# Altium PCB PCB_AVlabs AV-GMK MK I_2_2024-01-18 (1).pcbdoc (part 2 of 5)
Units mil, origin at the board's own origin, x right, y up, seen from the top; angles counter-clockwise.
Board outline 17777.1 x 9140.8 mil, 2 copper layers (Top Layer, Bottom Layer); 156 components, 279 nets, 1257 pads, 596 vias.
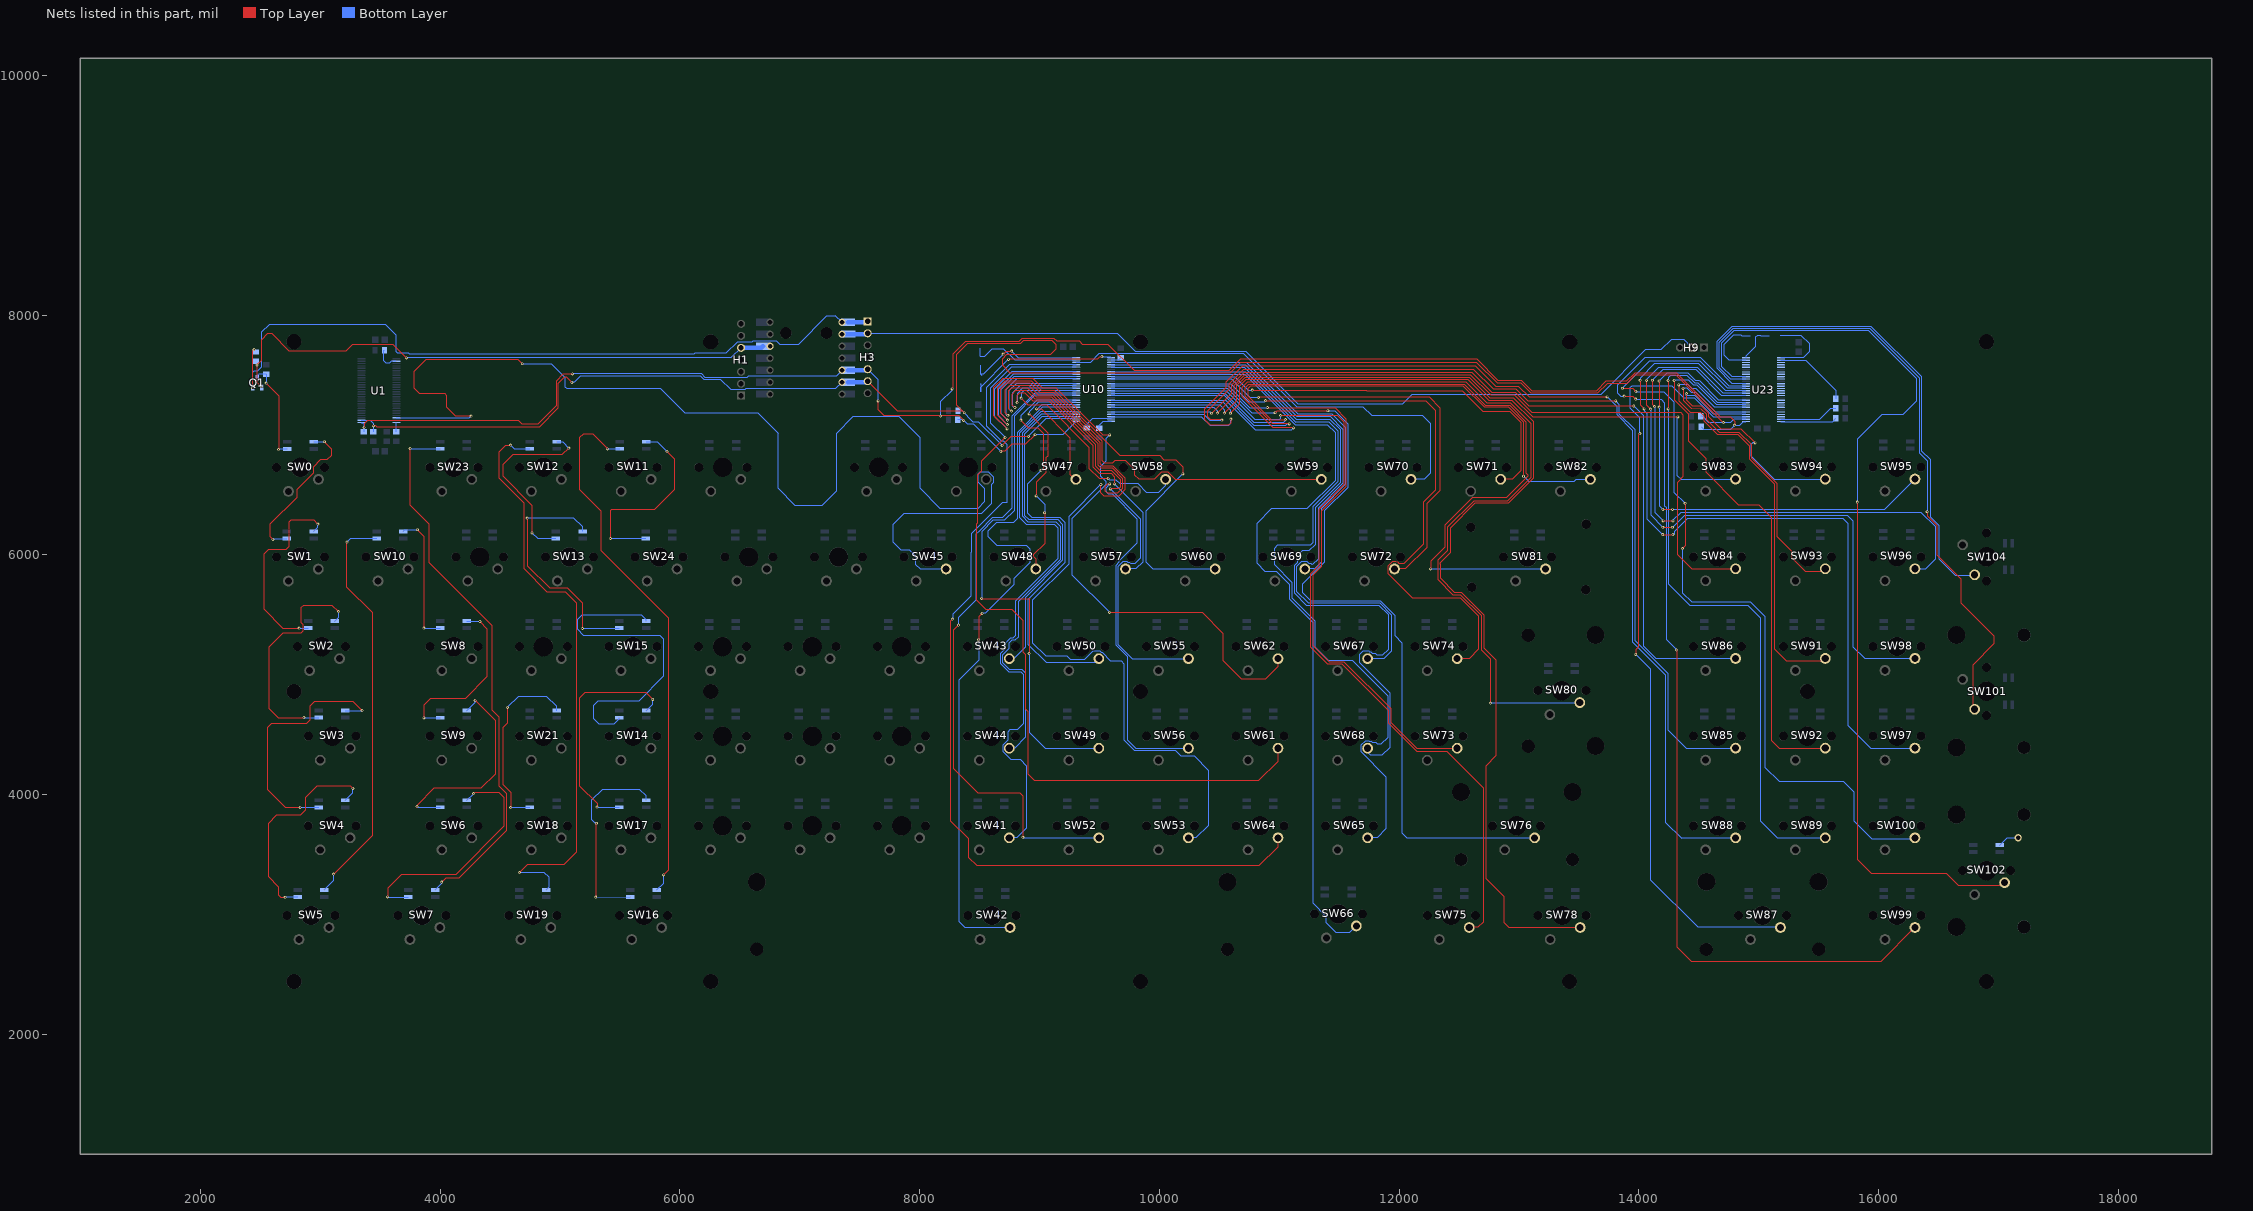
[diagram p2: the nets of this part, all layers, seen from the top]

## Via types
v1: diameter 24.41, hole 12.2, Top Layer to Bottom Layer, tented both sides, 596 vias

## Nets (pads, with @x,y where several pads share a name; then routed paths per layer and width w, separated by ;. In a path a pad name is that pad's centre, name@x,y a point inside that pad or via, vN(x,y) a via of type N, cw(c..) or ccw(c..) an arc to the next point about the centre after c; other vN are vias at no path point) (continued)
1_IO_4_7: SW45.SW1 U1.54 | length 10440.2
  Top Layer w10: v1(4258.8,7156.3) 4130.3,7156.3 4056.7,7229.9 4056.7,7327 4042.4,7341.3 3832.4,7341.3 3783.1,7390.6 3783.1,7529.9 3883.8,7630.6 4648.8,7630.6 v1(4685.9,7593.5)
  Bottom Layer w10: U1.54@3636.07,7142.32 4244.82,7142.32 v1(4258.8,7156.3) ; v1(4685.9,7593.5) 4928.9,7593.5 5041.2,7481.2 5041.2,7403.2 5055.2,7389.2 5837.2,7389.2 6042.2,7184.2 6649.2,7184.2 6819.2,7014.2 6816.2,7011.2 6816.2,6559.2 6960.2,6415.2 7186.2,6415.2 7307.2,6536.2 7307.2,7014.2 7447.2,7154.2 7826.2,7154.2 8000,6980.4 8000,6560.4 8170.2,6390.2 8489.2,6390.2 8545.2,6446.2 8545.2,6551.2 8491.2,6605.2 8491.2,6676.2 8506.2,6691.2 8574.2,6691.2 8616.2,6649.2 8616.2,6602.2 8597.2,6583.2 8597.2,6425.2 8515.2,6343.2 7869.2,6343.2 7777.2,6251.2 7777.2,6108.2 7844.2,6041.2 7915.2,6041.2 7964.2,5992.2 7964.2,5921.2 8003.6,5881.8 SW45.SW1@8221.19,5881.82
1_OE_PCA: R3.2 U1.30 | length 219.2
  Bottom Layer w10: R3.2@3536.57,7708.1 3529.8,7708.1 3529.8,7617.2 3549.4,7597.6 3576.1,7597.6 3593.3,7614.8 U1.30@3636.07,7614.76
1_RESET_PCA: R4.2 U1.56 | length 76.9
  Bottom Layer w10: R4.2@3634.7,7026.57 3636.07,7027.94 U1.56@3636.07,7102.95
2_A0: U10.27 | length 935.8
  Bottom Layer w10: 8505.12,7724.1 8505.52,7654.4 8543.3,7654.4 8606.9,7718 8698.6,7718 8791.74,7624.86 U10.27@9306.73,7624.86
2_A1: U10.28 | length 990.6
  Top Layer w10: v1(8696.2,7673.6) 8722,7699.4 v1(8768.6,7699.4)
  Bottom Layer w10: 8505.72,7581.3 8506.12,7511 ; 8519.52,7497.6 8506.12,7511 ; v1(8696.2,7673.6) 8533.6,7511 8506.12,7511 ; v1(8768.6,7699.4) 8823.45,7644.55 U10.28@9306.73,7644.55
2_A2: U10.29 | length 1307.1
  Top Layer w10: v1(8741.5,7630.1) 8745.5,7634.1 9484.6,7634.1 9503.6,7653.1 v1(9520.9,7653.1)
  Bottom Layer w10: 8507.92,7428.6 8508.92,7427.6 8508.92,7359 8508.92,7397.52 v1(8741.5,7630.1) ; v1(9520.9,7653.1) 9589.52,7653.1 U10.29@9598.07,7644.55
2_INT_PCA: R8.2 U10.55 | length 252.5
  Bottom Layer w10: R8.2@9396.2,7057.27 9396.2,7088.7 9441.4,7133.9 9596.9,7133.9 U10.55@9598.07,7132.74
2_IO_0_0: SW43.SW1 U10.3 | length 2842.9
  Bottom Layer w10: SW43.SW1@8748.09,5133.82 8785.2,5133.8 8879.4,5228 8879.4,5643.2 9191.6,5955.4 9191.6,6255.1 9151.6,6295.1 8910.8,6295.1 8875.1,6330.8 8875.1,7007.4 9020.1,7152.4 U10.3@9306.73,7152.42
2_IO_0_1: SW44.SW1 U10.4 | length 3848.2
  Bottom Layer w10: SW44.SW1@8748.09,4386.52 8791.7,4386.5 8881.3,4476.1 8881.3,5016.1 8853.3,5044.1 8747.3,5044.1 8688.3,5103.1 8688.3,5160.1 8744.3,5216.1 8744.3,5263.1 8767.3,5286.1 8794.3,5286.1 8822.3,5314.1 8822.3,5608.8 9173.3,5959.8 9173.3,6240 9136.5,6277.2 8904.3,6277.2 8857.2,6324.3 8857.2,7000.8 8857.5,7013.1 9015.7,7172.1 U10.4@9306.73,7172.11
2_IO_0_2: SW41.SW1 U10.5 | length 4878.9
  Bottom Layer w10: SW41.SW1@8747.99,3639.32 8810.4,3639.3 8891.1,3720 8891.1,4239.7 8838.1,4292.7 8761.1,4292.7 8691.8,4362 8691.8,4409.6 8734.1,4451.9 8734.1,4519.7 8754.1,4539.7 8814.1,4539.7 8863.1,4588.7 8863.1,4959.8 8864.4,4961.1 8864.4,5005.1 8845.7,5023.8 8741.7,5023.8 8671.3,5094.2 8671.3,5174 8712.8,5215.5 8712.8,5261.4 8754.3,5302.9 8779.1,5302.9 8799.1,5322.9 8799.1,5613.7 9150.9,5965.5 9150.9,6227.7 9124.6,6254 8889.5,6254 8830.2,6313.3 8830.2,7012.8 9009.2,7191.8 U10.5@9306.73,7191.79
2_IO_0_3: SW42.SW1 U10.7 | length 5836.9
  Top Layer w10: v1(8491.9,5291.7) 8491.9,5481.9 v1(8521.5,5511.5)
  Bottom Layer w10: v1(8491.9,5291.7) 8491.9,5119.2 8328.3,4955.6 8328.3,2941.6 8378.6,2891.3 SW42.SW1@8754.59,2891.32 ; v1(8521.5,5511.5) 8547.5,5511.5 8784.8,5748.8 8784.8,5801.7 8917.9,5934.8 8917.9,6052.2 8889.1,6081 8642.6,6081 8569.8,6153.8 8569.8,6196 8641.2,6267.4 8781.2,6267.4 8812.6,6298.8 8812.6,7018.6 9025.2,7231.2 U10.7@9306.73,7231.16
2_IO_0_4: SW47.SW1 U10.8 | length 1095.4
  Top Layer w10: v1(8976.4,7217.2) 9014.8,7217.2 9253.6,6978.4 9253.6,6974.3 9253.6,6670.6 9294.38,6629.82 SW47.SW1@9303.99,6629.82
  Bottom Layer w10: v1(8976.4,7217.2) 8983.7,7217.2 9017.3,7250.8 U10.8@9306.73,7250.85
2_IO_0_5: SW48.SW1 U10.9 | length 2335.4
  Top Layer w10: SW48.SW1@8969.39,5881.82 8969.38,5967.27 8948.8,5987.85 8948.8,5999.6 9042.1,6092.9 9042.1,6349.4 v1(9043.6,6350.9) ; v1(8972.2,6491.9) 8972.2,6603.3 9054.4,6685.5 9054.4,6807.6 9070.1,6823.3 ; 9070.1,6823.3 9070.1,7018.4 ; 9070.1,6823.3 9070.1,7018.4 ; 9070.1,7018.4 v1(8913.7,7174.8) 9070.1,7018.4
  Bottom Layer w10: v1(8913.7,7174.8) 8913.7,7193.3 8990.9,7270.5 U10.9@9306.73,7270.53 ; v1(8972.2,6491.9) 9043.6,6420.5 v1(9043.6,6350.9)
2_IO_0_6: SW50.SW1 U10.10 | length 3695.4
  Top Layer w10: v1(8845.2,7123) 8908.4,7059.8 8986.3,7059.8 9032.9,7013.2 9032.9,6705.1 v1(9013.9,6705.1)
  Bottom Layer w10: v1(8845.2,7123) 8845.2,7159.5 8975.9,7290.2 U10.10@9306.73,7290.22 ; v1(9013.9,6705.1) 8896.7,6587.9 8896.7,6351.7 8933.7,6314.7 9167.7,6314.7 9210.7,6271.7 9210.7,5935.7 8901.7,5626.7 8901.7,5254.7 9054.6,5101.8 9495.28,5101.8 SW50.SW1@9495.29,5133.82
2_IO_0_7: SW49.SW1 U10.12 | length 4433.5
  Top Layer w10: v1(8518.1,5636.8) 8519.5,5635.4 8919.4,5635.4 8914.1,5630.1 v1(8914.1,5175.4)
  Bottom Layer w10: v1(8518.1,5636.8) 8518.1,6194.1 8611.4,6287.4 8707.3,6287.4 8788.7,6368.8 8788.7,7155.72 8962.57,7329.59 U10.12@9306.73,7329.59 ; v1(8914.1,5175.4) 8914.1,4519.4 9046.98,4386.52 SW49.SW1@9495.29,4386.52
2_IO_1_0: SW52.SW1 U10.13 | length 5463.7
  Top Layer w10: v1(8324.5,5413.1) 8282.8,5371.4 8282.8,4217.8 8485.5,4015.1 8835.5,4015.1 8861.5,3989.1 v1(8861.5,3644.1)
  Bottom Layer w10: v1(8324.5,5413.1) 8324.5,5473.1 8470.5,5619.1 8470.5,6171.1 8496.5,6197.1 8606.5,6307.1 8608.5,6307.1 8689.5,6307.1 8769.5,6387.1 8769.5,7155.7 8767.5,7157.7 8959.07,7349.27 U10.13@9306.73,7349.27 ; v1(8861.5,3644.1) 8866.28,3639.32 SW52.SW1@9495.29,3639.32
2_IO_1_1: SW58.SW1 U10.14 | length 2217.1
  Top Layer w10: v1(8846.2,7306.8) 8900.8,7252.2 9059.5,7252.2 9412.9,6898.8 9412.9,6721.5 9496.9,6637.5 v1(9572.9,6637.5)
  Bottom Layer w10: v1(8846.2,7306.8) 8846.2,7345.5 8869.66,7368.96 U10.14@9306.73,7368.96 ; v1(9572.9,6637.5) 9583.2,6627.2 9637.5,6627.2 9669.5,6595.2 9820.2,6595.2 9892.2,6523.2 9996.2,6523.2 10051.98,6578.98 SW58.SW1@10051.99,6629.82
2_IO_1_2: SW57.SW1 U10.15 | length 2842.5
  Top Layer w10: v1(8814.2,7269.9) 8812.9,7271.2 8812.9,7329.9 8835.5,7352.5 8875.5,7352.5 8944.8,7283.2 9075.5,7283.2 9446.2,6912.5 9446.2,6732.5 9499.5,6679.2 9596.9,6679.2 9624.9,6651.2 v1(9624.9,6591.2)
  Bottom Layer w10: v1(8814.2,7269.9) 8814.2,7343.2 8812.9,7344.5 8857.04,7388.64 U10.15@9306.73,7388.64 ; v1(9624.9,6591.2) 9861.4,6354.7 9861.4,5939.7 9803.5,5881.8 SW57.SW1@9717.39,5881.82
2_IO_1_3: SW55.SW1 U10.16 | length 4481.8
  Top Layer w10: v1(8794.4,7228.7) 8773.8,7249.3 8773.8,7340.6 8804.2,7371 8889,7371 8958.8,7301.2 9086.6,7301.2 9465.1,6922.7 9465.1,6743.3 9502.9,6705.5 9598.3,6705.5 9672.3,6631.5 9672.3,6564.5 9658.3,6550.5 v1(9590.3,6550.5)
  Bottom Layer w10: v1(8794.4,7228.7) 8787.7,7228.7 8774.4,7242 8774.4,7346 8836.73,7408.33 U10.16@9306.73,7408.33 ; v1(9590.3,6550.5) 9838.8,6302 9838.8,5969.7 9793.5,5924.4 9764.1,5924.4 9754.8,5933.7 9738.8,5933.7 9730.8,5941.7 9694.8,5941.7 9654.8,5901.7 9654.8,5252.5 9773.5,5133.8 SW55.SW1@10242.59,5133.82
2_IO_1_4: SW56.SW1 U10.17 | length 5582
  Top Layer w10: v1(8766.1,7198.7) 8743.9,7220.2 8743.9,7368 8770.3,7394.4 8896.1,7394.4 8971.8,7318.7 9098.2,7318.7 9484.6,6932.3 9484.6,6752.2 9512.4,6724.4 9606.1,6724.4 9690.4,6640.1 9690.4,6552.2 9650.4,6512.2 9568.9,6512.2 9549.6,6531.5 9549.6,6570.1 9570.3,6590.8 v1(9586.1,6590.8)
  Bottom Layer w10: v1(8766.1,7198.7) 8745.4,7218.7 8745.4,7368 8805.4,7428 U10.17@9306.73,7428.01 ; v1(9586.1,6590.8) 9551.5,6556.2 9551.5,6531.6 9575,6508.1 9605.5,6508.1 9811,6302.6 9811,6097.1 9661,5947.1 9661,5936.6 9634.5,5910.1 9634.5,5249.1 9731,5152.6 9731,4457.9 9802.28,4386.62 SW56.SW1@10242.59,4386.62
2_IO_1_5: SW53.SW1 U10.19 | length 7477.7
  Top Layer w10: v1(8736.5,7163.7) 8715.5,7184.7 8715.5,7376.7 8753.5,7414.7 8910.5,7414.7 8989.5,7335.7 9104.5,7335.7 9502.5,6937.7 9502.5,6764.7 9522.5,6744.7 9612.5,6744.7 9712.5,6644.7 9712.5,6541.7 9660.3,6489.5 9539.5,6489.5 9512.5,6516.5 v1(9512.5,6586.5)
  Bottom Layer w10: v1(8736.5,7163.7) 8726.5,7163.7 8718.5,7171.7 8718.5,7376.7 8809.18,7467.38 U10.19@9306.73,7467.38 ; v1(9512.5,6586.5) 9242.6,6316.6 9242.6,5922.6 8939.9,5619.9 8939.9,5267.4 9050.4,5156.9 9226.6,5156.9 9255.6,5127.9 9377.6,5127.9 9449.6,5199.9 9502.6,5199.9 9516.6,5185.9 9522.6,5185.9 9591.6,5116.9 9681,5116.9 9704.7,5093.2 9704.7,4456.8 9791.6,4369.9 10130.6,4369.9 10178.6,4321.9 10289.6,4321.9 10406.6,4204.9 10406.6,3741.9 10304.02,3639.32 SW53.SW1@10242.59,3639.32
2_IO_1_6: SW59.SW1 U10.20 | length 4462
  Top Layer w10: v1(8733.6,7123.7) 8675.6,7181.7 8675.6,7384.2 8727.6,7436.2 8919.6,7436.2 9000.6,7355.2 9115.6,7355.2 9519.6,6951.2 9519.6,6790.2 9540.6,6769.2 9612.6,6769.2 9631.6,6788.2 9716.6,6788.2 9792.6,6712.2 9792.6,6669.2 9827.7,6634.1 9962.6,6634.1 10020.6,6692.1 10069.1,6692.1 10131.38,6629.82 SW59.SW1@11351.19,6629.82
  Bottom Layer w10: v1@8732.6,7113.2 8732.6,7122.7 v1(8733.6,7123.7) 8677.6,7179.7 8677.6,7375.2 8676.6,7376.2 8787.47,7487.07 U10.20@9306.73,7487.07
2_IO_1_7: SW60.SW1 U10.21 | length 4765.8
  Top Layer w10: v1(8732.2,7085.3) 8652.2,7165.3 8652.2,7392.3 8713.7,7453.8 8933.2,7453.8 9014.2,7372.8 9125.2,7372.8 9668.9,6829.1 10002,6829.1 10036.7,6794.4 10136.7,6794.4 10196.5,6734.6 v1(10196.5,6675.3)
  Bottom Layer w10: v1(8732.2,7085.3) 8655.2,7162.3 8655.2,7378.8 8783.15,7506.75 U10.21@9306.73,7506.75 ; v1(10196.5,6675.3) 9884.5,6363.3 9884.5,5941.3 9944,5881.8 SW60.SW1@10465.39,5881.82
2_IO_2_0: SW62.SW1 U10.22 | length 6358.7
  Top Layer w10: v1(8730.7,7049.5) 8620.7,7159.5 8620.7,7395.9 8697.2,7472.4 8944.3,7472.4 9024.3,7392.4 9137.1,7392.4 9528.6,7000.9 v1(9586.4,7000.9) ; v1(9584.3,5520.2) 10357.7,5520.2 10530.8,5347.1 10530.8,5120.5 10684.2,4967.1 10888.1,4967.1 10989.78,5068.78 SW62.SW1@10989.79,5133.82
  Bottom Layer w10: v1(8730.7,7049.5) 8623.6,7156.6 8623.6,7382.2 8767.84,7526.44 U10.22@9306.73,7526.44 ; v1(9584.3,5520.2) 9269.5,5835 9269.5,6302 9552.4,6584.9 9552.4,6613.9 9507.4,6658.9 9507.4,6734.9 9553.4,6780.9 9553.4,6967.9 v1(9586.4,7000.9)
2_IO_2_1: SW61.SW1 U10.24 | length 6747.3
  Top Layer w10: v1(8712.8,6978.7) 8514.8,6780.7 8514.8,6696.8 8479.6,6661.6 8479.6,6261.6 8472.2,6254.2 8472.2,5624.6 8550,5546.8 8768.5,5546.8 8859.2,5456.1 8859.2,5193.1 8882.6,5169.7 8882.6,4716.6 8903,4696.2 8903,4172.1 8956.7,4118.4 10828.9,4118.4 10989.78,4279.28 SW61.SW1@10989.79,4386.62
  Bottom Layer w10: v1(8712.8,6978.7) 8590.5,7101 8590.5,7391 8765.31,7565.81 U10.24@9306.73,7565.81
2_IO_2_2: SW64.SW1 U10.25 | length 7853.6
  Top Layer w10: v1(8275.2,5463.6) 8257.8,5446.2 8257.8,3783.6 8405.8,3635.6 8405.8,3478.3 8475.1,3409 10835.2,3409 10989.78,3563.58 SW64.SW1@10989.79,3639.32
  Bottom Layer w10: v1(8275.2,5463.6) 8275.2,5503.6 8427.2,5655.6 8427.2,6018.4 8429.8,6021 8429.8,6175.6 8688.5,6434.3 8725.8,6434.3 8725.8,6923.7 8696.5,6953 8681.8,6953 8556.5,7078.3 8556.5,7394.3 8747.7,7585.5 U10.25@9306.73,7585.49
2_IO_2_3: SW70.SW1 U10.26 | length 3825.3
  Bottom Layer w10: U10.26@9306.73,7605.18 9425.9,7605.2 9499.9,7679.2 10700.9,7679.2 11144.9,7235.2 11697.9,7235.2 11770.1,7163 12194.2,7163 12260.9,7096.3 12260.9,6679.7 12211,6629.8 SW70.SW1@12099.19,6629.82
2_IO_2_4: SW69.SW1 U10.31 | length 3551.5
  Bottom Layer w10: U10.31@9598.07,7605.18 10726.4,7605.2 11153.9,7177.7 11439.1,7177.7 11551.2,7065.6 11551.2,6586.7 11350.2,6385.7 11350.2,5937 11290.9,5877.7 11286.8,5881.8 SW69.SW1@11213.39,5881.82
2_IO_2_5: SW67.SW1 U10.32 | length 5163.9
  Bottom Layer w10: U10.32@9597.4,7585.3 10716.9,7585.3 11147.6,7154.5 11424.6,7154.5 11530.6,7048.6 11530.6,6594.8 11323.6,6387.8 11323.6,5963.6 11276.6,5916.6 11266.6,5926.6 11249.1,5926.6 11232.1,5943.6 11184.6,5943.6 11142.6,5901.6 11142.6,5695.5 11240.1,5598 11836.4,5598 11935.4,5499.1 11935.4,5195.3 11873.7,5133.7 SW67.SW1@11736.3,5133.7
2_IO_2_6: SW68.SW1 U10.33 | length 6250.6
  Bottom Layer w10: U10.33@9597.4,7565.7 10709.9,7565.7 11143.2,7132.4 11421.5,7132.4 11508.2,7045.8 11508.2,6603 11298.9,6393.8 11298.9,6085.8 11245.6,6032.4 11192.2,6032.4 11167.9,6008.2 11167.9,5963.3 11150.9,5946.3 11150.9,5934.6 11126.1,5909.8 11126.1,5882 11123.7,5879.6 11123.7,5681.8 11224.2,5581.2 11830.4,5581.2 11907.1,5504.5 11907.1,5210 11861.1,5164.1 11816.1,5164.1 11803.6,5176.6 11778.1,5176.6 11767.4,5187.2 11755.7,5187.2 11748.9,5194.1 11695.6,5194.1 11666.6,5165 11666.6,5103 11921.9,4847.7 11921.9,4392.4 11856.2,4326.8 11764,4326.8 11736.3,4354.4 SW68.SW1@11736.3,4386.4
2_IO_2_7: SW65.SW1 U10.35 | length 6785.8
  Bottom Layer w10: U10.35@9598.07,7526.44 10717.6,7526.4 11137.9,7106.1 11139.9,7108.1 11413.9,7108.1 11488.9,7033.1 11488.9,6611.1 11285.9,6408.1 11280.9,6402.4 11280.9,6102.1 11256.9,6078.1 10983.9,6078.1 10956.9,6051.1 10956.9,5919.1 11105.3,5770.7 11105.3,5643.2 11296.6,5451.9 11296.6,5231.7 11407.1,5121.2 11607.5,5121.2 11903.8,4824.9 11903.8,4475.9 11845.7,4417.7 11823.6,4417.7 11809.6,4431.7 11778.6,4431.7 11769.6,4440.7 11755.6,4440.7 11750.6,4445.7 11715.7,4445.7 11679.5,4409.5 11679.5,4359.8 11890.1,4149.2 11890.1,3713.3 11815.9,3639.3 SW65.SW1@11736.99,3639.32
2_IO_3_0: SW66.SW1 U10.36 | length 7202.3
  Bottom Layer w10: U10.36@9598.1,7506.7 10712.4,7506.7 11134.7,7084.4 11401.4,7084.4 11465.4,7020.4 11465.4,6617.7 11230.7,6383 10933.4,6383 10811.4,6261 10811.4,5933.1 10880.1,5864.4 10973.4,5864.4 11085.4,5752.4 11085.4,5631.4 11278.8,5438 11278.8,3096.4 11388.1,2987.1 11388.1,2936.4 11472.1,2852.4 11588.1,2852.4 11639.9,2904.2 SW66.SW1@11642.79,2904.22
2_IO_3_1: SW71.SW1 U10.37 | length 4176
  Top Layer w10: v1(10774.9,7373) 11726.9,7372.8 11729.5,7370.2 12526.9,7370.2 12698,7199.1 12921.6,7199.1 13013.7,7107 13013.7,6699.1 12944.5,6629.9 SW71.SW1@12847.19,6629.92
  Bottom Layer w10: U10.37@9598.07,7487.07 10628.83,7487.07 10742.9,7373 v1(10774.9,7373)
2_IO_3_2: SW72.SW1 U10.38 | length 4398.7
  Top Layer w10: v1(10826.1,7313.4) 10829.1,7316.4 12249.9,7316.4 12338.8,7227.5 12338.8,6534.9 12231.4,6427.5 12231.4,6060.8 12052.42,5881.82 SW72.SW1@11961.39,5881.82
  Bottom Layer w10: U10.38@9598.07,7467.38 10599.12,7467.38 10754.1,7312.4 10755.1,7313.4 v1(10826.1,7313.4)
2_IO_3_3: SW74.SW1 U10.40 | length 5799.1
  Top Layer w10: v1(10886,7285.3) 10887.3,7286.6 12220.7,7286.6 12302.2,7205.1 12302.2,6540.3 12200.4,6438.5 12200.4,6088.4 12038.6,5926.6 12000.4,5926.6 11990.8,5936.2 11978.5,5936.2 11972.2,5942.5 11941.9,5942.5 11905.3,5905.9 11905.3,5845 12109,5641.3 12511.6,5641.3 12660.9,5492 12660.9,5210.6 12584.1,5133.8 SW74.SW1@12484.19,5133.82
  Bottom Layer w10: U10.40@9598.07,7428.01 10593.49,7428.01 10743.7,7277.8 10878.5,7277.8 v1(10886,7285.3)
2_IO_3_4: SW73.SW1 U10.41 | length 5704.4
  Top Layer w10: v1(10900.3,7228.6) 10902.5,7226.4 11465.1,7226.4 11555.8,7135.7 11555.8,6569 11352.1,6365.3 11352.1,5900.5 11279.9,5828.3 11279.9,5244.9 11415.1,5109.7 11538.4,5109.7 11929.9,4718.2 11929.9,4602.3 12145.7,4386.5 SW73.SW1@12484.29,4386.52
  Bottom Layer w10: U10.41@9598.07,7408.33 10574.57,7408.33 10755.3,7227.6 10756.3,7228.6 v1(10900.3,7228.6)
2_IO_3_5: SW76.SW1 U10.42 | length 7488.3
  Top Layer w10: v1(10966.2,7184.6) 10983,7201.4 v1(11406.2,7201.4)
  Bottom Layer w10: U10.42@9598.07,7388.64 10564.86,7388.64 10770.2,7183.3 10771.5,7184.6 v1(10966.2,7184.6) ; v1(11406.2,7201.4) 11461.2,7201.4 11570,7092.6 11570,6561.2 11375,6366.2 11375,5938.4 11191.4,5754.8 11191.4,5689 11263.5,5616.9 11842.8,5616.9 11962.1,5497.6 11962.1,5327.6 12021.4,5268.3 12021.4,3679.9 12062,3639.3 SW76.SW1@13130.69,3639.32
2_IO_3_6: SW75.SW1 U10.43 | length 7330.5
  Top Layer w10: v1(11012.2,7161.2) 11015.2,7164.2 11485.2,7164.2 11538.2,7111.2 11538.2,6585.2 11328.2,6375.2 11328.2,5908.2 11258.2,5838.2 11258.2,5232.2 11400.2,5090.2 11522.5,5090.2 11911.2,4701.5 11911.2,4597.2 12147.2,4361.2 12396.2,4361.2 12701.2,4056.2 12701.2,2935.5 12657,2891.3 SW75.SW1@12584.99,2891.32
  Bottom Layer w10: U10.43@9598.07,7368.96 10557.44,7368.96 10796.2,7130.2 11005.2,7130.2 11012.2,7137.2 v1(11012.2,7161.2)
2_IO_3_7: SW82.SW1 U10.44 | length 5490.9
  Top Layer w10: v1(11051.3,7128) 10934.2,7128 10737.4,7324.8 10737.4,7385.4 10758.1,7406.1 12534.8,7406.1 12712.1,7228.8 12916.1,7228.8 13037.4,7107.5 v1(13037.4,6655.4)
  Bottom Layer w10: U10.44@9598.07,7349.27 10545.7,7349.3 10788.3,7106.7 11039.1,7106.7 11051.3,7118.9 v1(11051.3,7128) ; v1(13037.4,6655.4) 13080,6612.8 13461.4,6612.8 13478.42,6629.82 SW82.SW1@13595.39,6629.82
2_IO_4_0: SW81.SW1 U10.45 | length 7302.4
  Top Layer w10: v1(11083.5,7091.7) 10947,7091.7 10716.3,7322.4 10716.3,7391.6 10747.1,7422.4 12542.8,7422.4 12719.9,7246.7 12922.1,7246.7 13057,7111.8 13057,6683.9 13071.3,6669.6 13071.3,6654.6 12891.7,6475 12608.1,6475 12380.6,6247.5 12380.6,6063.8 12262,5945.2 v1(12262,5882.4)
  Bottom Layer w10: U10.45@9598.07,7329.59 10540.6,7329.6 10789.2,7081 11056.3,7081 11067,7091.7 v1(11083.5,7091.7) ; v1(12262,5882.4) SW81.SW1@13221.29,5881.82
2_IO_4_1: SW80.SW1 U10.47 | length 8597.1
  Top Layer w10: v1(11118.2,7058) 10951,7058 10692.5,7316.5 10692.5,7397.3 10736.7,7441.5 12557.5,7441.5 12729.6,7269.4 12926,7269.4 13096.8,7098.6 13096.8,6642.5 12902.7,6448.4 12621.4,6448.4 12401.4,6228.4 12401.4,6033.8 12321.4,5953.8 12321.4,5795.1 12448.1,5668.4 12510.7,5668.4 12685.4,5493.7 12685.4,5209.7 12761.4,5133.7 v1(12761.4,4763.1)
  Bottom Layer w10: U10.47@9598.07,7290.22 10553.8,7290.2 10801,7043 11103.2,7043 v1(11118.2,7058) v1@11118.2,7060.8 ; v1(12761.4,4763.1) 12765.52,4767.22 SW80.SW1@13506.69,4767.22
2_IO_4_2: SW78.SW1 U10.48 | length 9571.6
  Top Layer w10: v1(10591.8,7180.6) 10669.2,7258 10669.2,7408.6 10723.8,7463.2 12573.2,7463.2 12746.5,7289.9 12941.2,7289.9 13118.5,7112.6 13118.5,6637.9 12909.2,6428.6 12630.5,6428.6 12425.2,6223.3 12425.2,6015.2 12339.8,5929.8 12339.8,5925.9 12341.2,5924.5 12341.2,5807.2 12459.8,5688.6 12518.5,5688.6 12706.5,5500.6 12706.5,5224.6 12807.8,5123.3 12807.8,4324.6 12721.2,4238 12721.2,3300.6 12871.8,3150 12871.8,2935.2 12915.68,2891.32 SW78.SW1@13510.19,2891.32
  Bottom Layer w10: U10.48@9598.07,7270.53 10531.2,7270.5 10591.8,7209.9 v1(10591.8,7180.6)
2_IO_4_3: SW83.SW1 U10.49 | length 6104.2
  Top Layer w10: v1(10542.4,7181.3) 10646.9,7285.8 10646.9,7412.8 10717.1,7483 12584.2,7483 12755.2,7312 12952.7,7312 13113.9,7150.8 v1(14324.3,7150.8)
  Bottom Layer w10: U10.49@9598.07,7250.85 10502.35,7250.85 10542.4,7210.8 v1(10542.4,7181.3) ; v1(14324.3,7150.8) 14317.6,7150.8 14317.6,6665.6 14351.8,6631.4 SW83.SW1@14806.39,6631.42
2_IO_4_4: SW84.SW1 U10.50 | length 6849
  Top Layer w10: v1(10483.7,7181.7) 10623.7,7321.7 10623.7,7412.4 10713.7,7502.4 12594.4,7502.4 12762.2,7334.6 12960.8,7334.6 13108,7187.4 14349.6,7187.4 14367.6,7169.4 14367.6,6649.4 14318.6,6600.4 14318.6,6005.4 14440.58,5883.42 SW84.SW1@14806.39,5883.42
  Bottom Layer w10: U10.50@9598.07,7231.16 10455.6,7231.2 10483.7,7203.1 v1(10483.7,7181.7)
2_IO_4_5: SW86.SW1 U10.52 | length 7508.4
  Top Layer w10: v1(10436.4,7180.5) 10604.8,7348.9 10604.8,7417.6 10708.9,7521.7 12605.4,7521.7 12772.6,7354.5 12966.8,7354.5 13080.1,7241.2 v1(13956.9,7241.2)
  Bottom Layer w10: U10.52@9598.07,7191.79 10425.11,7191.79 v1(10436.4,7180.5) ; v1(13956.9,7241.2) 14035.2,7162.9 14035.2,5241.7 14141.5,5135.4 SW86.SW1@14806.39,5135.42
2_IO_4_6: SW85.SW1 U10.53 | length 8358.9
  Top Layer w10: v1(10520.7,7122.7) 10516.5,7126.9 10427.6,7126.9 10403.6,7150.9 10403.6,7202.9 10580.9,7380.2 10580.9,7428.2 10702,7549.3 12619.9,7549.3 12785.7,7383.5 12972.5,7383.5 13072.5,7283.5 v1(13806.7,7283.5)
  Bottom Layer w10: U10.53@9598.07,7172.11 10371.3,7172.1 10422.1,7122.7 v1(10520.7,7122.7) ; v1(13806.7,7283.5) 13833,7257.2 13833,7178.2 13963.9,7047.3 13963.9,5287.1 14240.7,5010.3 14240.7,4542.6 14395.98,4387.32 SW85.SW1@14806.39,4387.32
2_IO_4_7: SW88.SW1 U10.54 | length 9471.1
  Top Layer w10: v1(10596.1,7131.6) 10595.1,7130.6 10595.1,7098.9 10575.1,7078.9 10425.8,7078.9 10379.1,7125.6 10379.1,7218.9 10557.8,7397.6 10557.8,7441.6 10693.9,7577.7 12636.2,7577.7 12806.5,7407.4 12995.5,7407.4 13085.8,7317.1 v1(13735.3,7317.1)
  Bottom Layer w10: U10.54@9598.07,7152.42 10350.8,7152.4 10423.1,7080.1 10580.6,7080.1 10596.1,7095.6 v1(10596.1,7131.6) ; v1(13735.3,7317.1) 13813.8,7238.6 13813.8,7172.8 13945.9,7040.7 13945.9,5275.4 14220.8,5000.5 14220.8,3770.6 14357.6,3633.8 14363.12,3639.32 SW88.SW1@14806.39,3639.32
2_OE_PCA: R10.2 U10.30 | length 88.8
  Bottom Layer w10: U10.30@9598.07,7624.86 9660.23,7624.86 R10.2@9679.1,7643.73
2_RESET_PCA: R9.2 U10.56 | length 137.5
  Bottom Layer w10: R9.2@9498.1,7056.67 9498.1,7080.9 9530.3,7113.1 U10.56@9598.07,7113.05
3_A0: U23.27 | length 538.2
  Bottom Layer w10: U23.27@14893.03,7623.56 14754.14,7623.56 14712.7,7665 14712.7,7754.5 14792.7,7834.5 14849.72,7834.5 14857.3,7826.92 14927.6,7827
3_A1: U23.28 | length 324
  Bottom Layer w10: U23.28@14893.03,7643.25 14893.03,7655.83 14972.2,7735 14972.2,7815.5 14985.02,7828.32 15015.6,7828.32 15085.8,7828.2
3_A2: U23.29 | length 597.5
  Bottom Layer w10: 15177.3,7831.12 15247,7831.12 15248.5,7832.62 15350.4,7832.6 15419.1,7763.9 15419.1,7692.4 15369.9,7643.2 U23.29@15184.37,7643.25
3_INT_PCA: R13.2 U23.55 | length 495.9
  Bottom Layer w10: U23.55@15184.37,7131.44 15508.54,7131.44 15600.1,7223 R13.2@15642.33,7223
3_IO_0_0: SW87.SW1 U23.3 | length 6532.3
  Top Layer w10: v1(13973.4,5169.7) 13973.4,5206.3 13995.2,5228.5 13995.2,6998.8 v1(14007.8,7011.4)
  Bottom Layer w10: v1(13973.4,5169.7) 14099.7,5043.4 14099.7,3285.5 14493.88,2891.32 SW87.SW1@15180.39,2891.32 ; v1(14007.8,7011.4) 14007.8,7144.2 13928.5,7223.5 13928.5,7396.7 13942.5,7410.7 14273.9,7410.7 14374,7310.6 14462,7310.6 14621.5,7151.1 U23.3@14893.03,7151.12
3_IO_0_1: SW94.SW1 U23.4 | length 2661.4
  Top Layer w10: v1(14969.3,6933.7) 14850.1,7052.9 14681.6,7052.9 ; 14396.5,7291.7 v1(14396.5,7345.1) 14396.5,7291.7 ; 14396.5,7291.7 14444.3,7243.9 ; 14396.5,7291.7 14444.3,7243.9 ; 14444.3,7243.9 14520.1,7243.9 ; 14444.3,7243.9 14520.1,7243.9 ; 14520.1,7243.9 14577.9,7186.1 ; 14520.1,7243.9 14577.9,7186.1 ; 14577.9,7156.6 14577.9,7186.1 ; 14577.9,7156.6 14681.6,7052.9 ; 14577.9,7156.6 14577.9,7186.1 ; 14577.9,7156.6 14681.6,7052.9
  Bottom Layer w10: v1(14396.5,7345.1) 14396.5,7327.2 14469.1,7327.2 14625.5,7170.8 U23.4@14893.03,7170.81 ; v1(14969.3,6933.7) 14948.4,6933.7 14933.2,6918.5 14933.2,6827.7 15129.48,6631.42 SW94.SW1@15554.49,6631.42
3_IO_0_2: SW93.SW1 U23.5 | length 2875.1
  Top Layer w10: v1(14367.8,7388.8) 14367.8,7288.7 14435.9,7220.6 14515.2,7219.9 14560.2,7174.9 14560.2,7132.1 14668.1,7024.2 14834.4,7024.2 14935.9,6922.7 14935.9,6811.4 15148.8,6598.5 15148.8,6153.4 15270.2,6032 15270.2,5979.1 15386.6,5862.7 15533.8,5862.7 SW93.SW1@15554.49,5883.42
  Bottom Layer w10: v1(14367.8,7388.8) 14403.8,7388.8 14439.8,7352.8 14476.8,7352.8 14639.11,7190.49 U23.5@14893.03,7190.49
3_IO_0_3: SW91.SW1 U23.7 | length 3791.4
  Top Layer w10: v1(14332.3,7417.3) 14332.3,7286.6 14428.3,7190.6 14512.3,7190.6 14541.6,7161.3 14541.6,7118.7 14655,7005.3 14823,7005.3 14919,6909.3 14919,6802.5 15129.6,6591.9 15129.6,5214.7 15227,5117.3 15536.36,5117.3 SW91.SW1@15554.39,5135.32
  Bottom Layer w10: v1(14332.3,7417.3) 14411,7417.3 14444.4,7383.9 14477.6,7383.9 14631.64,7229.86 U23.7@14893.03,7229.86
3_IO_0_4: SW92.SW1 U23.8 | length 4602.7
  Top Layer w10: v1(14293.3,7455.3) 14293.3,7294.3 14410.3,7177.3 14410.3,6950.3 14556.3,6804.3 14556.3,6691.3 14829.3,6418.3 14999.3,6418.3 15104.3,6313.3 15104.3,4451.3 15170.3,4385.3 15552.4,4385.3 SW92.SW1@15554.39,4387.32
  Bottom Layer w10: v1(14293.3,7455.3) 14415.3,7455.3 14457.3,7413.3 14487.3,7413.3 14651.05,7249.55 U23.8@14893.03,7249.55
3_IO_0_5: SW89.SW1 U23.9 | length 5649.6
  Top Layer w10: v1(14243.2,7217.8) v1(14243.2,7454.8)
  Bottom Layer w10: v1(14243.2,7217.8) 14243.2,5757.6 14422.7,5578.1 14907.9,5578.1 15011.6,5474.4 15011.6,3780.1 15152.3,3639.4 SW89.SW1@15554.39,3639.32 ; v1(14243.2,7454.8) 14243.2,7475.8 14261.2,7493.8 14405.2,7493.8 14469.2,7429.8 14495.2,7429.8 14655.8,7269.2 U23.9@14893.03,7269.23
3_IO_0_6: SW95.SW1 U23.10 | length 4135.7
  Top Layer w10: v1(14169,7232) v1(14169,7449.7) ; v1(14200.1,6378.4) v1(14280.1,6378.4)
  Bottom Layer w10: v1(14169,7232) 14169,6409.5 v1(14200.1,6378.4) ; v1(14169,7449.7) 14234,7514.7 14240.5,7514.7 14411.5,7514.7 14475.5,7450.7 14505,7450.7 14510,7445.7 14666.78,7288.92 U23.10@14893.03,7288.92 ; v1(14280.1,6378.4) 16049.36,6378.4 SW95.SW1@16302.39,6631.42
3_IO_0_7: SW96.SW1 U23.12 | length 4945.4
  Top Layer w10: v1(14112,7456.2) 14112,7254.1 v1(14130.6,7235.5) ; v1(14202.2,6283.1) v1(14284.2,6283.1)
  Bottom Layer w10: v1(14112,7456.2) 14199.2,7543.4 14477.7,7543.4 14692.81,7328.29 U23.12@14893.03,7328.29 ; v1(14130.6,7235.5) 14130.6,6354.7 v1(14202.2,6283.1) ; v1(14284.2,6283.1) 14284.2,6287.1 14353.2,6356.1 16352.2,6356.1 16470.2,6238.1 16470.2,5962.1 16388.2,5880.1 16305.8,5880.1 SW96.SW1@16302.39,5883.52
3_IO_1_0: SW98.SW1 U23.13 | length 5504.4
  Top Layer w10: v1(14062.4,7454.2) 14062.4,7250.6 v1(14097.4,7215.6) ; v1(14199.5,6229.9) v1(14278.8,6229.9)
  Bottom Layer w10: v1(14062.4,7454.2) 14062.4,7462.1 14162.4,7562.1 14490.9,7562.1 14705.03,7347.97 U23.13@14893.03,7347.97 ; v1(14097.4,7215.6) 14097.4,6332 v1(14199.5,6229.9) ; v1(14278.8,6229.9) 14282.4,6229.9 14383.1,6330.6 15737.1,6330.6 15784.2,6283.5 15784.2,5233.6 15882.2,5135.6 SW98.SW1@16302.49,5135.42
3_IO_1_1: SW97.SW1 U23.14 | length 6362.9
  Top Layer w10: v1(14009.9,7456) 14009.9,7251.4 v1(14043.5,7217.8) ; v1(14198.9,6168.2) v1(14282.9,6168.2)
  Bottom Layer w10: v1(14009.9,7456) 14009.9,7473.5 14128.3,7591.9 14500.5,7591.9 14724.74,7367.66 U23.14@14893.03,7367.66 ; v1(14043.5,7217.8) 14043.5,7202.9 14066.8,7179.6 14066.8,6300.3 v1(14198.9,6168.2) ; v1(14282.9,6168.2) 14290.9,6176.2 14298.9,6176.2 14298.9,6196.2 14408.2,6305.5 15698.9,6305.5 15741.1,6263.3 15741.1,4579.9 15935.5,4385.5 16300.46,4385.5 SW97.SW1@16302.39,4387.42
3_IO_1_2: SW100.SW1 U23.15 | length 7005.6
  Top Layer w10: v1(13861.5,7389.2) 13946.5,7389.2 v1(13974.5,7361.2) ; v1(14363.3,6052) 14385.5,6074.2 v1(14385.5,6429.8)
  Bottom Layer w10: v1(13861.5,7389.2) 14087.5,7615.2 14511.5,7615.2 14739.36,7387.34 U23.15@14893.03,7387.34 ; v1(13974.5,7361.2) 14208.8,7361.2 14292.2,7277.8 14292.2,6523.1 v1(14385.5,6429.8) ; v1(14363.3,6052) 14363.3,5683.5 14439.2,5607.6 14928.1,5607.6 15048.5,5487.2 15048.5,4229.9 15168.9,4109.5 15705.9,4109.5 15793,4022.4 15793,3783.5 15943,3633.5 16296.56,3633.5 SW100.SW1@16302.39,3639.32
3_IO_1_3: SW99.SW1 U23.16 | length 8495.5
  Top Layer w10: v1(13876.8,7323.3) 13948.8,7323.3 v1(13973.8,7298.3) ; v1(14313.9,5206) 14313.9,2729.9 14435.2,2608.6 16019.86,2608.6 SW99.SW1@16302.59,2891.32
  Bottom Layer w10: v1(13876.8,7323.3) 13848.8,7323.3 13818.8,7353.3 13818.8,7414.3 14048.8,7644.3 14077.8,7644.3 14515.8,7644.3 14529.8,7630.3 14753.07,7407.03 U23.16@14893.03,7407.03 ; v1(13973.8,7298.3) 14184.8,7298.3 14212.8,7270.3 14212.8,6410.9 14226.3,6397.4 14226.3,5293.6 v1(14313.9,5206)
3_IO_1_4: SW104.SW1 U23.17 | length 4391.1
  Bottom Layer w10: U23.17@14893.03,7426.71 14779.8,7426.7 14651.6,7554.9 14651.6,7782.9 14776.9,7908.2 15934.3,7908.2 16354.3,7488.2 16354.3,6869.6 16428.6,6795.3 16428.6,6319.2 16499.6,6248.2 16499.6,5968.3 16638.3,5829.6 16796.7,5829.6 SW104.SW1@16800.52,5833.41
3_IO_1_5: SW101.SW1 U23.19 | length 6642.3
  Top Layer w10: v1(16404.6,6359.3) 16404.6,6326.4 16485.5,6245.5 16485.5,6001.5 16685.5,5801.5 16685.5,5600.2 16961.5,5324.2 16961.5,5257.5 16784.2,5080.2 16784.2,4727.74 SW101.SW1@16800.52,4711.41
  Bottom Layer w10: 14768.85,7873.55 14670.1,7774.8 ; U23.19@14893.03,7466.08 14765.2,7466.1 ; U23.19@14893.03,7466.08 14765.22,7466.08 ; 15943.4,7873.5 16338.2,7478.7 ; v1(16404.6,6359.3) 16404.6,6786.1 16338.2,6852.5 16338.2,7478.7 ; 14670.1,7561.2 14765.22,7466.08 ; 14670.1,7561.2 14670.1,7774.8 ; 14670.1,7561.2 14765.2,7466.1 ; 14670.1,7561.2 14670.1,7774.8 ; 14670.1,7774.8 14786,7890.7 15926.3,7890.7 16338.2,7478.7
3_IO_1_6: SW102.SW1 U23.20 | length 7913.8
  Top Layer w10: v1(15821.2,6439.1) 15821.2,3459.1 15938.2,3342.1 16564.2,3342.1 16664.2,3242.1 17027.26,3242.1 SW102.SW1@17050.49,3265.32
  Bottom Layer w10: U23.20@14893.03,7485.77 14776.5,7485.8 14692.2,7570.1 14692.2,7770.1 14796.2,7874.1 15911.2,7874.1 16313.2,7472.1 16313.2,7282.1 16200.2,7169.1 16026.2,7169.1 15821.2,6964.1 v1(15821.2,6439.1)
3_IO_1_7: U23.21
3_IO_2_0: U23.22
3_IO_2_1: U23.24
3_IO_2_2: U23.25
3_IO_2_3: U23.26
3_IO_2_4: U23.31
3_IO_2_5: U23.32
3_IO_2_6: U23.33
3_IO_2_7: U23.35
3_IO_3_0: U23.36
3_IO_3_1: U23.37
3_IO_3_2: U23.38
3_IO_3_3: U23.40
3_IO_3_4: U23.41
3_IO_3_5: U23.42
3_IO_3_6: U23.43
3_IO_3_7: U23.44
3_IO_4_0: U23.45
3_IO_4_1: U23.47
3_IO_4_2: U23.48
3_IO_4_3: U23.49
3_IO_4_4: U23.50
3_IO_4_5: U23.52
3_IO_4_6: U23.53
3_IO_4_7: U23.54
3_OE_PCA: R11.2 U23.30 | length 632.2
  Bottom Layer w10: U23.30@15184.37,7623.56 15390.54,7623.56 15642.23,7371.87 R11.2@15642.23,7301.8
3_RESET_PCA: R12.2 U23.56 | length 467.8
  Bottom Layer w10: U23.56@15184.37,7111.75 15615.58,7111.75 R12.2@15641.43,7137.6
3V3_PCA: H1.5 pad.12 Q1.1 R17.2 | length 4794.9
  Top Layer w10: v1(2508.9,7401.7) 2473.2,7437.4 v1(2473.2,7583.2) 2507.2,7617.2 2507.2,7790.8 2560.3,7843.9 2598.7,7843.9 2743.4,7699.2 3212.5,7699.2 3267,7753.7 3607.9,7753.7 v1(3719,7642.6)
  Bottom Layer w10: v1(3719,7642.6) 6426.59,7642.6 H1.5@6510.8,7726.8
  Bottom Layer w39.37: H1.5@6510.8,7726.8 6680.69,7726.81 pad.12@6693.44,7739.56
LED_IN: Q1.3 R16.1 SW0.DI | length 847.6
  Top Layer w10: v1(2549.6,7431.8) 2652.7,7328.7 v1(2652.7,6878.1)
  Bottom Layer w10: Q1.3@2474.6,7475.77 2474.6,7495.63 2485.9,7506.93 R16.1@2552,7506.93 2549.6,7504.53 v1(2549.6,7431.8) ; v1(2652.7,6878.1) 2658.09,6883.49 SW0.DI@2723.64,6883.46
LED_OUT: pad.15 SW102.DO | length 178
  Bottom Layer w10: SW102.DO@17010.55,3578.85 17071.3,3639.6 pad.15@17163.4,3639.6
MCU_LED_OUT: H3.1 pad.1 Q1.2 R17.1 | length 6240.2
  Top Layer w10: v1(2437.3,7389.6) 2438.1,7389.6 2438.1,7700.5 v1(2448.7,7711.1)
  Bottom Layer w10: v1(2437.3,7389.6) 2437.3,7521.8 2450.9,7535.4 2479.4,7535.4 2512.3,7568.3 2512.3,7858.5 2578.8,7925 3541.8,7925 3631.2,7835.6 3631.2,7698.5 3642.3,7687.4 3733,7687.4 3744.1,7676.3 6121.9,7676.3 6129,7683.4 6389.3,7683.4 6483,7777.1 6603.3,7777.1 6612.2,7786 6804.1,7786 6832.3,7757.8 6990.5,7757.8 7227.5,7994.8 7298.2,7994.8 pad.1@7353.2,7939.8
  Bottom Layer w39.37: pad.1@7403.44,7939.56 7558.96,7939.56 H3.1@7567.1,7947.7
POT_OUT: H3.2 H9.2 pad.2 | length 7585.4
  Bottom Layer w10: H3.2@7567.1,7847.7 9650.2,7847.7 9799.2,7698.7 10719.5,7698.7 11156.2,7262 12030.2,7262 12109.2,7341 13685.7,7341 14057.5,7712.8 14187.1,7712.8 14272.3,7798 14372.4,7798 H9.2@14441.9,7728.5
  Bottom Layer w39.37: pad.2@7353.2,7839.8 7559.21,7839.8 H3.2@7567.1,7847.7
S$82865: 
S$82869: 
S$91322: 
S$91326: 
S$112041: 
S$112045: 
S$112154: 
S$112158: 
S$112162: 
S$112172: 
S$112857: 
S$112891: 
S$112949: 
S$113106: 
S$113110: 
S$113114: 
S$113118: 
S$113245: 
S$113276: 
S$113409: 
S$113413: 
S$113417: 
S$113421: 
S$113432: 
S$113436: 
S$113440: 
S$113450: 
S$113463: 
S$113467: 
S$114343: 
S$114353: 
SCL_PCA: H3.6 pad.6 R2.2 R6.2 R15.2 U1.2 U10.2 U23.2 | length 15584.9
  Top Layer w10: v1(3443.4,7075) 3464.2,7075 3475.6,7063.6 4826.3,7063.6 4983.4,7220.7 4983.4,7428.6 5037,7482.2 5057,7482.2 v1(5100.6,7438.6) ; H3.6@7567.1,7447.7 7813.7,7201.1 8355.2,7201.1 v1(8372.4,7184.6) 8308.8,7248.2 8308.8,7671.5 8401.8,7764.5 8844.8,7764.5 8869.1,7788.7 9102.7,7788.7 9136.4,7755 9136.4,7712.6 9090.9,7667.1 8723.8,7667.1 8687.8,7631.3 8687.8,7583.3 8752.7,7518.4 10591.2,7518.4 10680.6,7607.8 12643.6,7607.8 12817.6,7433.8 13015.6,7433.8 13099.6,7349.8 13656.6,7349.8 13738.6,7431.8 13902.6,7431.8 13970.6,7499.8 14306.7,7499.8 v1(14704.44,7102.1) ; v1(8687.9,6913) 8763.3,6988.4 v1(8907.1,6988.4)
  Bottom Layer w10: U1.2@3344.73,7122.64 3419.36,7122.64 3443.5,7098.5 R2.2@3443.5,7026.87 ; v1(5100.6,7438.6) 5119.1,7438.6 5171,7490.5 6174.6,7490.5 6176.5,7488.6 6204.3,7460.8 6224.7,7460.8 6343.3,7460.8 6428.4,7375.7 6543.2,7375.7 6550.6,7383.1 7296.98,7383.1 pad.6@7353.44,7439.56 ; R6.2@8320.27,7202.5 8354.3,7202.5 8449.2,7107.6 8493.3,7107.6 v1(8687.9,6913) ; v1(8907.1,6988.4) 9051.44,7132.74 U10.2@9306.73,7132.74 ; R15.2@14514.57,7154.6 14531.9,7154.6 14584.4,7102.1 v1(14704.44,7102.1) 14763.7,7102.1 14793.04,7131.44 U23.2@14893.03,7131.44
  Bottom Layer w39.37: pad.6@7403.44,7439.56 7558.97,7439.56 H3.6@7567.1,7447.7
SDA_PCA: H3.5 pad.5 R1.2 R7.2 R14.2 U1.1 U10.1 U23.1 | length 15023
  Top Layer w10: v1(3366,7062.9) 3366,7091.4 3393.2,7118.6 4657.4,7118.6 4686,7090 4813.8,7090 4967.4,7243.6 4967.4,7447.9 5023.8,7504.3 5098.6,7504.3 v1(5103.3,7509) ; v1(7653.5,7284.5) 7653.5,7208.5 7704.2,7157.8 v1(8173.23,7157.8) 8331.1,7157.8 v1(8367.61,7121.29) ; v1(8270.7,7383.6) 8279.2,7392.1 8279.2,7677.1 8385.2,7783.1 8832.2,7783.1 8854.7,7805.6 9120.2,7805.6 9142.2,7783.6 9331.7,7783.6 9358.7,7756.6 9569.7,7756.6 9789.7,7537.3 10582.4,7537.3 10678.3,7633.2 12645.5,7633.2 12824.4,7454.3 13019.4,7454.3 13105.4,7368.3 13647.4,7368.3 13729.4,7450.3 13897.4,7450.3 13967.4,7520.3 14313.4,7520.3 14680.4,7153.3 14760.4,7153.3 14797.9,7115.8 v1(14797.9,7082.1) ; v1(8678.5,6862.3) 8710.5,6862.3 8769.2,6921 8883.3,6921 v1(8963.6,7001.3)
  Bottom Layer w10: U1.1@3344.73,7102.95 3352.55,7102.95 3367,7088.5 3365.2,7086.7 R1.2@3365.2,7026.97 ; v1(5103.3,7509) 6182.1,7509 6213.2,7477.9 6557.2,7477.9 6569.2,7489.9 7303.3,7489.9 pad.5@7353.2,7539.8 ; H3.5@7567.1,7547.7 7653.5,7461.29 v1(7653.5,7284.5) ; v1(8173.23,7157.8) 8177.2,7161.77 8177.2,7218.6 8178.2,7219.6 8178.2,7279.6 8270.7,7372.1 v1(8270.7,7383.6) ; R7.2@8319.47,7127.8 8361.1,7127.8 v1(8367.61,7121.29) 8399.9,7089 8451.8,7089 v1(8678.5,6862.3) ; v1(8963.6,7001.3) 9194.98,7001.3 U10.1@9306.73,7113.05 ; R14.2@14518.77,7069 14539.17,7048.6 14764.4,7048.6 v1(14797.9,7082.1) 14840.9,7082.1 14870.55,7111.75 U23.1@14893.03,7111.75
  Bottom Layer w39.37: pad.5@7403.44,7539.56 7558.97,7539.56 H3.5@7567.1,7547.7
SW0_DO: SW0.DO SW1.DI | length 1299.7
  Top Layer w10: v1(2606.5,6129.1) 2581.2,6154.2 2581.2,6253.1 2804.2,6476.1 2804.2,6544.1 2941.2,6681.1 2941.2,6732.1 3001.2,6792.1 3056.2,6792.1 3092.2,6828.1 3092.2,6886.1 v1(3035.2,6943.1)
  Bottom Layer w10: v1(2606.5,6129.1) 2612.99,6135.59 SW1.DI@2722.44,6135.56 ; SW0.DO@2946.1,6942.6 v1(3035.2,6943.1)
SW1_DO: SW1.DO SW2.DI | length 1677.1
  Top Layer w10: v1@2830.2,5389.1 2688.2,5389.1 2529.2,5548.1 2529.2,6006.1 2565.2,6041.1 2714.2,6041.1 2739.2,6066.1 2739.2,6271.1 2755.2,6287.1 2950.2,6287.1 v1(2981.2,6256.1)
  Bottom Layer w10: v1(2825.18,5389.1) SW2.DI@2899.94,5388.26 ; SW1.DO@2944.85,6194.65 2981.2,6231 v1(2981.2,6256.1)
SW3_DI: SW2.DO SW3.DI | length 1928.9
  Top Layer w10: v1(2864,4642.6) 2651.3,4642.6 2573.3,4720.6 2573.3,5229.8 2688.2,5344.7 2837.3,5344.7 2852.9,5360.3 2852.9,5421.8 2838.9,5435.8 2838.9,5557.8 2857.4,5576.3 3102.9,5576.3 v1(3153.9,5525.3)
  Bottom Layer w10: v1(2864,4642.6) 2865.11,4641.49 SW3.DI@2988.54,4641.46 ; SW2.DO@3122.35,5447.35 3153.9,5478.9 v1(3153.9,5525.3)
SW3_DO: SW3.DO SW4.DI | length 2124.9
  Top Layer w10: v1(2833.5,3893.7) 2707.8,3893.7 2558,4043.5 2558,4556.1 2592.5,4590.6 2883.5,4590.6 2912,4619.1 2912,4735.1 2952.5,4775.6 3275,4775.6 v1(3349.5,4701.1)
  Bottom Layer w10: v1(2833.5,3893.7) SW4.DI@2988.44,3893.46 ; SW3.DO@3210.9,4700.6 v1(3349.5,4701.1)
SW5_DI: SW4.DO SW5.DI | length 1829.6
  Top Layer w10: v1(2707.8,3143.5) 2671.9,3143.5 2650.5,3164.9 2650.5,3231.6 2565.2,3316.9 2565.2,3757.4 2635.5,3827.7 2835.5,3827.7 2876.5,3868.7 2876.5,3973.2 2973,4069.7 3255.5,4069.7 v1(3273,4052.2)
  Bottom Layer w10: v1(2707.8,3143.5) 2710.09,3145.79 SW5.DI@2811.44,3145.76 ; SW4.DO@3210.85,3952.55 3273,4014.7 v1(3273,4052.2)
SW5_DO: SW5.DO SW10.DI | length 3415.4
  Top Layer w10: v1(3113,3336.6) 3436.8,3660.4 3436.8,5514.8 3224,5727.6 v1(3224,6105.9)
  Bottom Layer w10: SW5.DO@3033.85,3204.85 3113,3284 v1(3113,3336.6) ; v1(3224,6105.9) 3254.39,6136.29 SW10.DI@3470.74,6136.26
SW6_DI: SW6.DI SW9.DO | length 1766.5
  Top Layer w10: v1(3808,3899.7) 3808,3911.7 3948,4051.7 4341.2,4051.7 4458.6,4169.1 4458.6,4621.1 v1(4293.3,4786.4)
  Bottom Layer w10: v1(3808,3899.7) 3813.91,3893.79 SW6.DI@4002.34,3893.76 ; SW9.DO@4224.55,4700.15 4293.3,4768.9 v1(4293.3,4786.4)
SW6_DO: SW6.DO SW7.DI | length 2025.5
  Top Layer w10: v1(3562.1,3147.2) 3562.1,3218.2 3677.1,3333.2 4129.1,3333.2 4530.1,3734.2 4530.1,3978.2 4488.1,4020.2 4292.1,4020.2 v1(4280.1,4008.2)
  Bottom Layer w10: v1(3562.1,3147.2) 3563.71,3145.59 SW7.DI@3736.54,3145.56 ; SW6.DO@4224.78,3952.82 v1(4280.1,4008.2) v1@4283.1,4008.2
SW7_DO: SW7.DO SW23.DI | length 4580.7
  Top Layer w10: v1(3750.1,6886) 3750.1,6413.2 3909.8,6253.5 3909.8,5932.4 4435.2,5407 4435.2,4704.4 4494,4645.6 4494,4069.2 4557.1,4006.1 4557.1,3703.4 4159.8,3306.1 4050,3306.1 v1(4014.1,3270.2)
  Bottom Layer w10: v1(3750.1,6886) 3751.91,6884.19 SW23.DI@4002.34,6884.16 ; SW7.DO@3958.98,3204.62 4014.1,3259.8 v1(4014.1,3270.2)
SW8_DI: SW8.DI SW10.DO | length 1102.5
  Top Layer w10: v1(3811,6208.9) 3866,6153.9 v1(3866,5388.9)
  Bottom Layer w10: SW10.DO@3693.15,6195.35 3706.7,6208.9 v1(3811,6208.9) ; v1(3866,5388.9) SW8.DI@4002.34,5388.06
SW8_DO: SW8.DO SW9.DI | length 1462.2
  Top Layer w10: v1(3865.3,4639.7) 3865.3,4746.4 3920,4801.1 4210.6,4801.1 4390.6,4981.1 4390.6,5385.1 v1(4332,5443.7)
  Bottom Layer w10: v1(3865.3,4639.7) 3866.69,4641.09 SW9.DI@4002.14,4641.06 ; SW8.DO@4224.75,5447.15 4228.2,5443.7 v1(4332,5443.7)
SW11_DO: SW11.DO SW24.DI | length 1678.4
  Top Layer w10: v1(5421,6136) 5421,6369 5429.2,6375.1 5785.8,6376.5 5952.4,6542.7 5952.4,6801.7 v1(5893.3,6860.3)
  Bottom Layer w10: v1(5421,6136) 5421.39,6136.39 SW24.DI@5714.94,6136.36 ; SW11.DO@5720.75,6943.35 5810.25,6943.35 v1(5893.3,6860.3)
SW12_DI: SW12.DI SW19.DO | length 4915.5
  Top Layer w10: v1(4588.2,6915.1) 4547.5,6915.1 4493.8,6861.4 4493.8,6639.1 4703.2,6429.7 4703.2,5881.6 4895.6,5689.2 5047.5,5689.2 5140.1,5596.6 5140.1,3841 5141.9,3839.2 5141.9,3524.3 5036.4,3418.8 4732,3418.8 v1(4662.6,3349.4)
  Bottom Layer w10: v1(4588.2,6915.1) 4619.01,6884.29 SW12.DI@4750.04,6884.26 ; v1(4662.6,3349.4) 4868.6,3349.4 4909.6,3308.4 4909.6,3230.2 SW19.DO@4884.25,3204.85
SW12_DO: SW12.DO SW13.DI | length 1620.3
  Top Layer w10: v1(4767.1,6183.2) 4767.1,6415.3 4523.9,6658.5 4523.9,6749.1 4607.3,6832.5 5017.1,6832.5 v1(5075.2,6890.6)
  Bottom Layer w10: v1(4767.1,6183.2) 4814.01,6136.29 SW13.DI@4966.84,6136.26 ; SW12.DO@4972.45,6943.35 5022.45,6943.35 v1(5075.2,6890.6)
SW13_DO: SW13.DO SW15.DI | length 2041.7
  Top Layer w10: v1(4726.6,6306.6) 4726.6,5910.6 4913.3,5723.9 5062.6,5723.9 5186.6,5599.9 v1(5186.6,5385.2)
  Bottom Layer w10: v1(4726.6,6306.6) 5116,6306.6 5189.3,6233.3 SW13.DO@5189.3,6195.4 ; v1(5186.6,5385.2) 5189.69,5388.29 SW15.DI@5496.74,5388.26
SW14_DI: SW14.DI SW15.DO | length 2818.1
  Bottom Layer w10: SW14.DI@5496.74,4640.96 5496.71,4633.91 5452,4589.2 5325.3,4589.2 5277.3,4637.2 5277.3,4739.9 5317.3,4779.9 5656,4779.9 5862.6,4986.5 5862.6,5301.3 5833.3,5330.6 5196,5330.6 5142.6,5384 5142.6,5457.2 5182.6,5497.2 5681.3,5497.2 5719.15,5459.35 SW15.DO@5719.15,5447.35
SW14_DO: SW14.DO SW17.DI | length 1927.3
  Top Layer w10: v1(5309.3,3894.6) 5309.3,3927.9 5162.6,4074.6 5162.6,4803.4 5207.1,4847.9 5721.3,4847.9 v1(5774.6,4794.6)
  Bottom Layer w10: v1(5309.3,3894.6) 5495.9,3894.6 SW17.DI@5496.74,3893.76 ; SW14.DO@5719.18,4700.02 5774.6,4755.5 v1(5774.6,4794.6)
SW16_DI: SW16.DI SW17.DO | length 1674.7
  Top Layer w10: v1(5299,3144.9) 5299,3755.6 v1(5304.3,3760.9)
  Bottom Layer w10: v1(5299,3144.9) SW16.DI@5586.64,3145.86 ; v1(5304.3,3760.9) 5295,3760.9 5260.3,3795.6 5260.3,3951.6 5351,4042.3 5665.7,4042.3 5719.15,3988.85 SW17.DO@5719.18,3952.82
SW16_DO: SW11.DI SW16.DO | length 4525.4
  Top Layer w10: v1(5396,6882.8) 5396,6888 5272.3,7011.7 5198.6,7011.7 5167.1,6980.2 5167.1,6540.7 5343.4,6364.4 5343.4,6035.4 5909.2,5469.6 5909.2,3375 v1(5864.4,3330.2)
  Bottom Layer w10: v1(5396,6882.8) 5397.49,6884.29 SW11.DI@5498.34,6884.26 ; SW16.DO@5809.05,3204.95 5864.4,3260.3 v1(5864.4,3330.2)
SW18_DI: SW18.DI SW21.DO | length 1555.7
  Top Layer w10: v1(4561.5,4727.2) 4561.5,4595.2 4524.5,4558.2 4524.5,4084.2 4588.5,4020.2 v1(4588.5,3891.2)
  Bottom Layer w10: v1(4561.5,4727.2) 4650.5,4816.2 4890.5,4816.2 4971.95,4734.75 SW21.DO@4971.98,4700.02 ; v1(4588.5,3891.2) 4591.09,3893.79 SW18.DI@4749.54,3893.76